# EAGLE board motor_bench_1 (EAGLE 4.16)

Size 100.13 x 100.47 mm. Coordinates in mm from the lower left corner, seen from the top.
Outline: 0,0 100,0 100,100 0,100 0,0
Outline: circle at 50.13,50.47 radius 50
Copper layers (1*16): Top 0.035mm / dielectric 1.5mm / Bottom 0.035mm
Design rules "default": minimum track width 10mil, minimum drill 24mil, track to track 8mil, track to pad 8mil, pad to pad 8mil, via to via 8mil, smd to smd 8mil, copper to edge 40mil, drill to drill 8mil, minimum pad ring 10mil, minimum via ring 8mil, stop-mask expansion 4mil, vias tented up to drill 0mil, thermal gap 10mil
Holes 12 mm at 50.13,50.47
Holes 2 mm at 38.13,50.47 62.13,50.47 5.13,50.47 95.13,50.47 75.13,50.47 25.13,50.47 50.13,25.47 50.13,5.47

## Footprints (pad centres in the part's own frame; a part is rotated, then mirrored left to right if it is on the bottom)
SO16-1 = smd 0.762 x 1.524: 1 -4.445,-4.775; 2 -3.175,-4.775; 3 -1.905,-4.775; 4 -0.635,-4.775; 5 0.635,-4.775; 6 1.905,-4.775; 7 3.175,-4.775; 8 4.445,-4.775; 9 4.445,4.775; 10 3.175,4.775; 11 1.905,4.775; 12 0.635,4.775; 13 -0.635,4.775; 14 -1.905,4.775; 15 -3.175,4.775; 16 -4.445,4.775
C0805K = smd 1.3 x 1.6: 1 -1,0; 2 1,0
C0402K = smd 0.925 x 0.74: 1 -0.6,0; 2 0.6,0
53047-04 = drill 0.5 pad 0.698 long: 1 1.875,0; 2 0.625,0; 3 -0.625,0; 4 -1.875,0
SOT23 = smd 1 x 1.4: 1 -0.95,-1.1; 2 0.95,-1.1; 3 0,1.1
DO-214BA = smd 1.85 x 1.68: A 1.87,0 | smd 1.32 x 1.68: C -2.12,0
BC-32 = smd 0.5 x 0.5: A2 -1.6,2.4; A3 -0.8,2.4; A4 0,2.4; A5 0.8,2.4; A6 1.6,2.4; B1 -2.4,1.6; B3 -0.8,1.6; B4 0,1.6; B5 0.8,1.6; B7 2.4,1.6; C1 -2.4,0.8; C2 -1.6,0.8; C6 1.6,0.8; C7 2.4,0.8; D1 -2.4,0; D2 -1.6,0; D6 1.6,0; D7 2.4,0; E1 -2.4,-0.8; E2 -1.6,-0.8; E6 1.6,-0.8; E7 2.4,-0.8; F1 -2.4,-1.6; F3 -0.8,-1.6; F4 0,-1.6; F5 0.8,-1.6; F7 2.4,-1.6; G2 -1.6,-2.4; G3 -0.8,-2.4; G4 0,-2.4; G5 0.8,-2.4; G6 1.6,-2.4
TQFP64 = smd 1.194 x 0.559: 1 -7.8,6; 2 -7.8,5.2; 3 -7.8,4.4; 4 -7.8,3.6; 5 -7.8,2.8; 6 -7.8,2; 7 -7.8,1.2; 8 -7.8,0.4; 9 -7.8,-0.4; 10 -7.8,-1.2; 11 -7.8,-2; 12 -7.8,-2.8; 13 -7.8,-3.6; 14 -7.8,-4.4; 15 -7.8,-5.2; 16 -7.8,-6; 33 7.8,-6; 34 7.8,-5.2; 35 7.8,-4.4; 36 7.8,-3.6; 37 7.8,-2.8; 38 7.8,-2; 39 7.8,-1.2; 40 7.8,-0.4; 41 7.8,0.4; 42 7.8,1.2; 43 7.8,2; 44 7.8,2.8; 45 7.8,3.6; 46 7.8,4.4; 47 7.8,5.2; 48 7.8,6 | smd 0.559 x 1.194: 17 -6,-7.8; 18 -5.2,-7.8; 19 -4.4,-7.8; 20 -3.6,-7.8; 21 -2.8,-7.8; 22 -2,-7.8; 23 -1.2,-7.8; 24 -0.4,-7.8; 25 0.4,-7.8; 26 1.2,-7.8; 27 2,-7.8; 28 2.8,-7.8; 29 3.6,-7.8; 30 4.4,-7.8; 31 5.2,-7.8; 32 6,-7.8; 49 6,7.8; 50 5.2,7.8; 51 4.4,7.8; 52 3.6,7.8; 53 2.8,7.8; 54 2,7.8; 55 1.2,7.8; 56 0.4,7.8; 57 -0.4,7.8; 58 -1.2,7.8; 59 -2,7.8; 60 -2.8,7.8; 61 -3.6,7.8; 62 -4.4,7.8; 63 -5.2,7.8; 64 -6,7.8
XBEE = drill 0.6 long: P$1 -11,9; P$2 -11,7; P$3 -11,5; P$4 -11,3; P$5 -11,1; P$6 -11,-1; P$7 -11,-3; P$8 -11,-5; P$9 -11,-7; P$10 -11,-9; P$11 11,-9; P$12 11,-7; P$13 11,-5; P$14 11,-3; P$15 11,-1; P$16 11,1; P$17 11,3; P$18 11,5; P$19 11,7; P$20 11,9
SOLDER_PAD_200_50 = smd 5.08 x 1.524: P$1 0,0
R0805 = smd 1.3 x 1.5: 1 -0.85,0; 2 0.85,0
M0805 = smd 1.3 x 1.6: 1 -0.95,0; 2 0.95,0
PTH = smd 2.184 x 2.184: P$1 -6.096,3.556; P$2 -6.096,0; P$3 -6.096,-3.556; P$4 6.096,4.826; P$5 6.096,-4.826
MICRO_CRYSTAL = smd 0.9 x 3.2: P$1 -1.5,0; P$2 0,0; P$3 1.5,0
SO08 = smd 0.6 x 2.2: 1 -1.905,-2.6; 2 -0.635,-2.6; 3 0.635,-2.6; 4 1.905,-2.6; 5 1.905,2.6; 6 0.635,2.6; 7 -0.635,2.6; 8 -1.905,2.6
SPARKFUN_MODULE = drill 0.8 pad 1.93 round: P$1 -7.62,7.62; P$2 -7.62,5.08; P$3 -7.62,2.54; P$4 -7.62,0; P$5 -7.62,-2.54; P$6 -7.62,-5.08; P$7 -7.62,-7.62; P$8 7.62,-7.62; P$9 7.62,-5.08; P$10 7.62,-2.54; P$11 7.62,0; P$12 7.62,2.54; P$13 7.62,5.08; P$14 7.62,7.62
TSSOP8 = smd 0.35 x 1.2: 1 -0.975,-2.925; 2 -0.325,-2.925; 3 0.325,-2.925; 4 0.975,-2.925; 5 0.975,2.925; 6 0.325,2.925; 7 -0.325,2.925; 8 -0.975,2.925
MICRO8 = smd 0.381 x 1.041: P$1 -0.978,-2.121; P$2 -0.33,-2.121; P$3 0.33,-2.121; P$4 0.978,-2.121; P$5 0.978,2.121; P$6 0.33,2.121; P$7 -0.33,2.121; P$8 -0.978,2.121

## Placement (x,y rotation side)
ACCEL_Z  MMA1220  [SO16-1]  90.52,93 90 top
C1  100nF  [C0805K]  44.1,62.66 90 top
C2  [C0805K]  57.32,12.26 0 top
C3  100nF  [C0805K]  81.13,97.39 0 top
C4  10nF  [C0805K]  81.13,90.65 0 top
C5  22nF  [C0402K]  78.63,41.97 90 top
C6  22nF  [C0402K]  78.63,38.97 90 top
C7  100nF  [C0402K]  70.63,34.47 0 top
C8  100nF  [C0402K]  74.13,34.47 0 top
C9  100nF  [C0402K]  77.13,34.47 0 top
C10  47nF  [C0402K]  81.13,38.97 270 top
C11  22nF  [C0402K]  81.13,41.97 90 top
C12  10nF  [C0805K]  27.01,18.88 0 top
C13  10nF  [C0805K]  27.01,7.9 0 top
CON_RANGEMETER  [53047-04]  12.17,39.12 0 top
D1  BAV199  [SOT23]  112.63,66.97 90 top  (outside the outline)
D2  BAV199  [SOT23]  128.13,66.97 90 top  (outside the outline)
D3  [DO-214BA]  121.63,67.47 0 top  (outside the outline)
D4  BAV199  [SOT23]  128.13,88.97 90 top  (outside the outline)
D5  [DO-214BA]  106.63,67.47 0 top  (outside the outline)
D6  [DO-214BA]  121.63,88.97 0 top  (outside the outline)
GYRO_Z  ADXR  [BC-32]  73.13,39.47 0 top
MCU  MEGA128-A  [TQFP64]  50.17,74.27 0 top
MODEM  XBEEPRO  [XBEE]  50.01,21.25 180 top
MOT1+  SOLDER_PAD200_50  [SOLDER_PAD_200_50]  106.63,70.97 0 top  (outside the outline)
MOT1-  SOLDER_PAD200_50  [SOLDER_PAD_200_50]  113.13,70.97 0 top  (outside the outline)
MOT2+  SOLDER_PAD200_50  [SOLDER_PAD_200_50]  128.63,71.47 0 top  (outside the outline)
MOT2-  SOLDER_PAD200_50  [SOLDER_PAD_200_50]  121.13,71.47 0 top  (outside the outline)
MOT3+  SOLDER_PAD200_50  [SOLDER_PAD_200_50]  121.63,92.97 0 top  (outside the outline)
MOT3-  SOLDER_PAD200_50  [SOLDER_PAD_200_50]  129.63,92.97 0 top  (outside the outline)
R1  100R  [R0805]  112.13,59.47 0 top  (outside the outline)
R2  100R  [R0805]  128.13,58.97 0 top  (outside the outline)
R3  10K  [R0805]  128.13,62.47 0 top  (outside the outline)
R4  [M0805]  56.4,20.78 270 top
R5  [M0805]  56.48,15.66 90 top
R6  10k  [M0805]  40.54,62.78 270 top
R7  1k  [M0805]  81.13,93.77 0 top
R8  100R  [R0805]  128.63,80.47 0 top  (outside the outline)
R9  10K  [R0805]  128.63,84.47 0 top  (outside the outline)
R10  10K  [R0805]  112.63,62.47 0 top  (outside the outline)
R11  5K  [M0805]  22.01,22.74 0 top
R12  5K  [M0805]  22.01,18.62 0 top
R13  500K  [M0805]  27.01,22.5 0 top
R14  5K  [M0805]  21.01,13.26 0 top
R15  5K  [M0805]  26.51,13.14 0 top
R16  500K  [M0805]  20.51,8.02 0 top
SUPPLY_1  PTH  [PTH]  8.29,91.55 90 top
U$1  MICRO_RESO  [MICRO_CRYSTAL]  49.67,62.55 180 top
U$2  IRF7809  [SO08]  121.13,81.97 0 top  (outside the outline)
U$3  IRF7809  [SO08]  121.13,60.47 0 top  (outside the outline)
U$4  IRF7809  [SO08]  106.13,60.97 0 top  (outside the outline)
U$5  HMC1052SF  [SPARKFUN_MODULE]  24.02,26.52 0 top
U$6  AD8552RU  [TSSOP8]  22.97,30.94 0 top
U$7  IRF7509  [MICRO8]  -35.03,-22.39 0 top  (outside the outline)
U$8  IRF7509  [MICRO8]  -43.92,-22.39 0 top  (outside the outline)

## Library data of the parts
ACCEL_Z GYRO_Z MODEM MOT1+ MOT1- MOT2+ MOT2- MOT3+ MOT3- SUPPLY_1 U$1-U$8 = paparazzi
C1-C13 R1-R16 = rcl
CON_RANGEMETER = con-molex
D1-D6 = diode
MCU = atmel

## Nets
2.5V: GYRO_Z.E1 GYRO_Z.E2
+3V3: C2.2 MODEM.P$1
+5V: ACCEL_Z.8 C3.2 C7.2 C8.1 CON_RANGEMETER.2 D1.2 D2.2 D4.2 GYRO_Z.A3 GYRO_Z.B3 GYRO_Z.E6 GYRO_Z.E7 R6.2 U$5.P$4 U$6.8
+6V: SUPPLY_1.P$3
ACCEL: C4.2 R7.2
ACCEL_STATUS: ACCEL_Z.6
ACCEL_TEST: ACCEL_Z.4
ADC0: MCU.61
ADC1: MCU.60
ADC2: MCU.59
ADC3: MCU.58
ADC4: MCU.57
ADC5: MCU.56
ADC6: MCU.55
ADC7: MCU.54
AOUT+: R11.1 U$5.P$3
AOUT-: R12.1 U$5.P$12
BOUT+: R15.1 U$5.P$14
BOUT-: R14.1 U$5.P$9
GND: ACCEL_Z.7 C1.1 C2.1 C3.1 C4.1 C7.1 C8.2 C9.2 C10.2 CON_RANGEMETER.1 D1.1 D2.1 D4.1 GYRO_Z.F1 GYRO_Z.F7 GYRO_Z.G2 GYRO_Z.G6 MCU.22 MCU.53 MODEM.P$10 R3.1 R5.1 R9.1 R10.1 SUPPLY_1.P$2 U$1.P$2 U$2.1 U$2.2 U$2.3 U$3.1 U$3.2 U$3.3 U$4.1 U$4.2 U$4.3 U$5.P$1 U$5.P$5 U$5.P$6 U$5.P$11 U$5.P$13 U$6.4
GYRO_RATE: C11.2 GYRO_Z.A2 GYRO_Z.B1
GYRO_TEMP: GYRO_Z.F3 GYRO_Z.G3
GYRO_TEST1: GYRO_Z.F5 GYRO_Z.G5
GYRO_TEST2: GYRO_Z.F4 GYRO_Z.G4
MAG_X: C12.1 R13.2 U$6.1
MAG_Y: C13.1 R16.2 U$6.7
MCU_RESET: C1.2 MCU.20 R6.1
MCU_RXD1: MCU.27 MODEM.P$2
MCU_TXD1: MCU.28 R4.1
N$1: MCU.24 U$1.P$1
N$2: MCU.23 U$1.P$3
N$3: R2.2 R3.2 U$3.4
N$4: D3.A MOT2-.P$1 U$3.5 U$3.6 U$3.7 U$3.8
N$5: MODEM.P$3 R4.2 R5.2
N$6: ACCEL_Z.5 R7.1
N$7: C5.2 GYRO_Z.A6 GYRO_Z.B7
N$8: C5.1 GYRO_Z.C6 GYRO_Z.C7
N$9: R1.2 R10.2 U$4.4
N$10: C6.2 GYRO_Z.A5 GYRO_Z.B5
N$11: C6.1 GYRO_Z.A4 GYRO_Z.B4
N$12: C11.1 GYRO_Z.C1 GYRO_Z.C2
N$13: D5.A MOT1-.P$1 U$4.5 U$4.6 U$4.7 U$4.8
N$14: C10.1 GYRO_Z.D6 GYRO_Z.D7
N$15: C9.1 GYRO_Z.D1 GYRO_Z.D2
N$16: R8.2 R9.2 U$2.4
N$17: D6.A MOT3-.P$1 U$2.5 U$2.6 U$2.7 U$2.8
N$18: CON_RANGEMETER.3
N$19: CON_RANGEMETER.4
N$21: C12.2 R12.2 R13.1 U$6.2
N$22: C13.2 R14.2 R16.1 U$6.6
PWM1: D1.3 MCU.5 R1.1
PWM2: D2.3 MCU.6 R2.1
PWM3: D4.3 MCU.7 R8.1
VBAT: D3.C D5.C D6.C MOT1+.P$1 MOT2+.P$1 MOT3+.P$1 SUPPLY_1.P$1
VCC: MCU.21
VCC1: MCU.52
VCC/2: R11.2 R15.2 U$6.3 U$6.5

## Tracks (layer width: path | path; a pad name or v marks a point on that pad's centre or on a via)
2.5V  (1 unrouted)
+3V3  (1 unrouted)
+5V  (14 unrouted)
ACCEL  (1 unrouted)
AOUT+  (1 unrouted)
AOUT-  (1 unrouted)
BOUT+  (1 unrouted)
BOUT-  (1 unrouted)
GND  (40 unrouted)
GYRO_RATE  (2 unrouted)
GYRO_TEMP  (1 unrouted)
GYRO_TEST1  (1 unrouted)
GYRO_TEST2  (1 unrouted)
MAG_X  (2 unrouted)
MAG_Y  (2 unrouted)
MCU_RESET  (2 unrouted)
MCU_RXD1  (1 unrouted)
MCU_TXD1  (1 unrouted)
N$1  (1 unrouted)
N$2  (1 unrouted)
N$3  (2 unrouted)
N$4  (5 unrouted)
N$5  (2 unrouted)
N$6  (1 unrouted)
N$7  (2 unrouted)
N$8  (2 unrouted)
N$9  (2 unrouted)
N$10  (2 unrouted)
N$11  (2 unrouted)
N$12  (2 unrouted)
N$13  (5 unrouted)
N$14  (2 unrouted)
N$15  (2 unrouted)
N$16  (2 unrouted)
N$17  (5 unrouted)
N$21  (3 unrouted)
N$22  (3 unrouted)
PWM1  (2 unrouted)
PWM2  (2 unrouted)
PWM3  (2 unrouted)
VBAT  (6 unrouted)
VCC/2  (3 unrouted)